# Altium PCB Nguon cam bien.PcbDoc
Units mil, origin at the board's own origin, x right, y up, seen from the top; angles counter-clockwise.
Board outline 4527.56 x 3799.21 mil, 2 copper layers (Top Layer, Bottom Layer); 37 components, 23 nets, 138 pads, 0 vias.
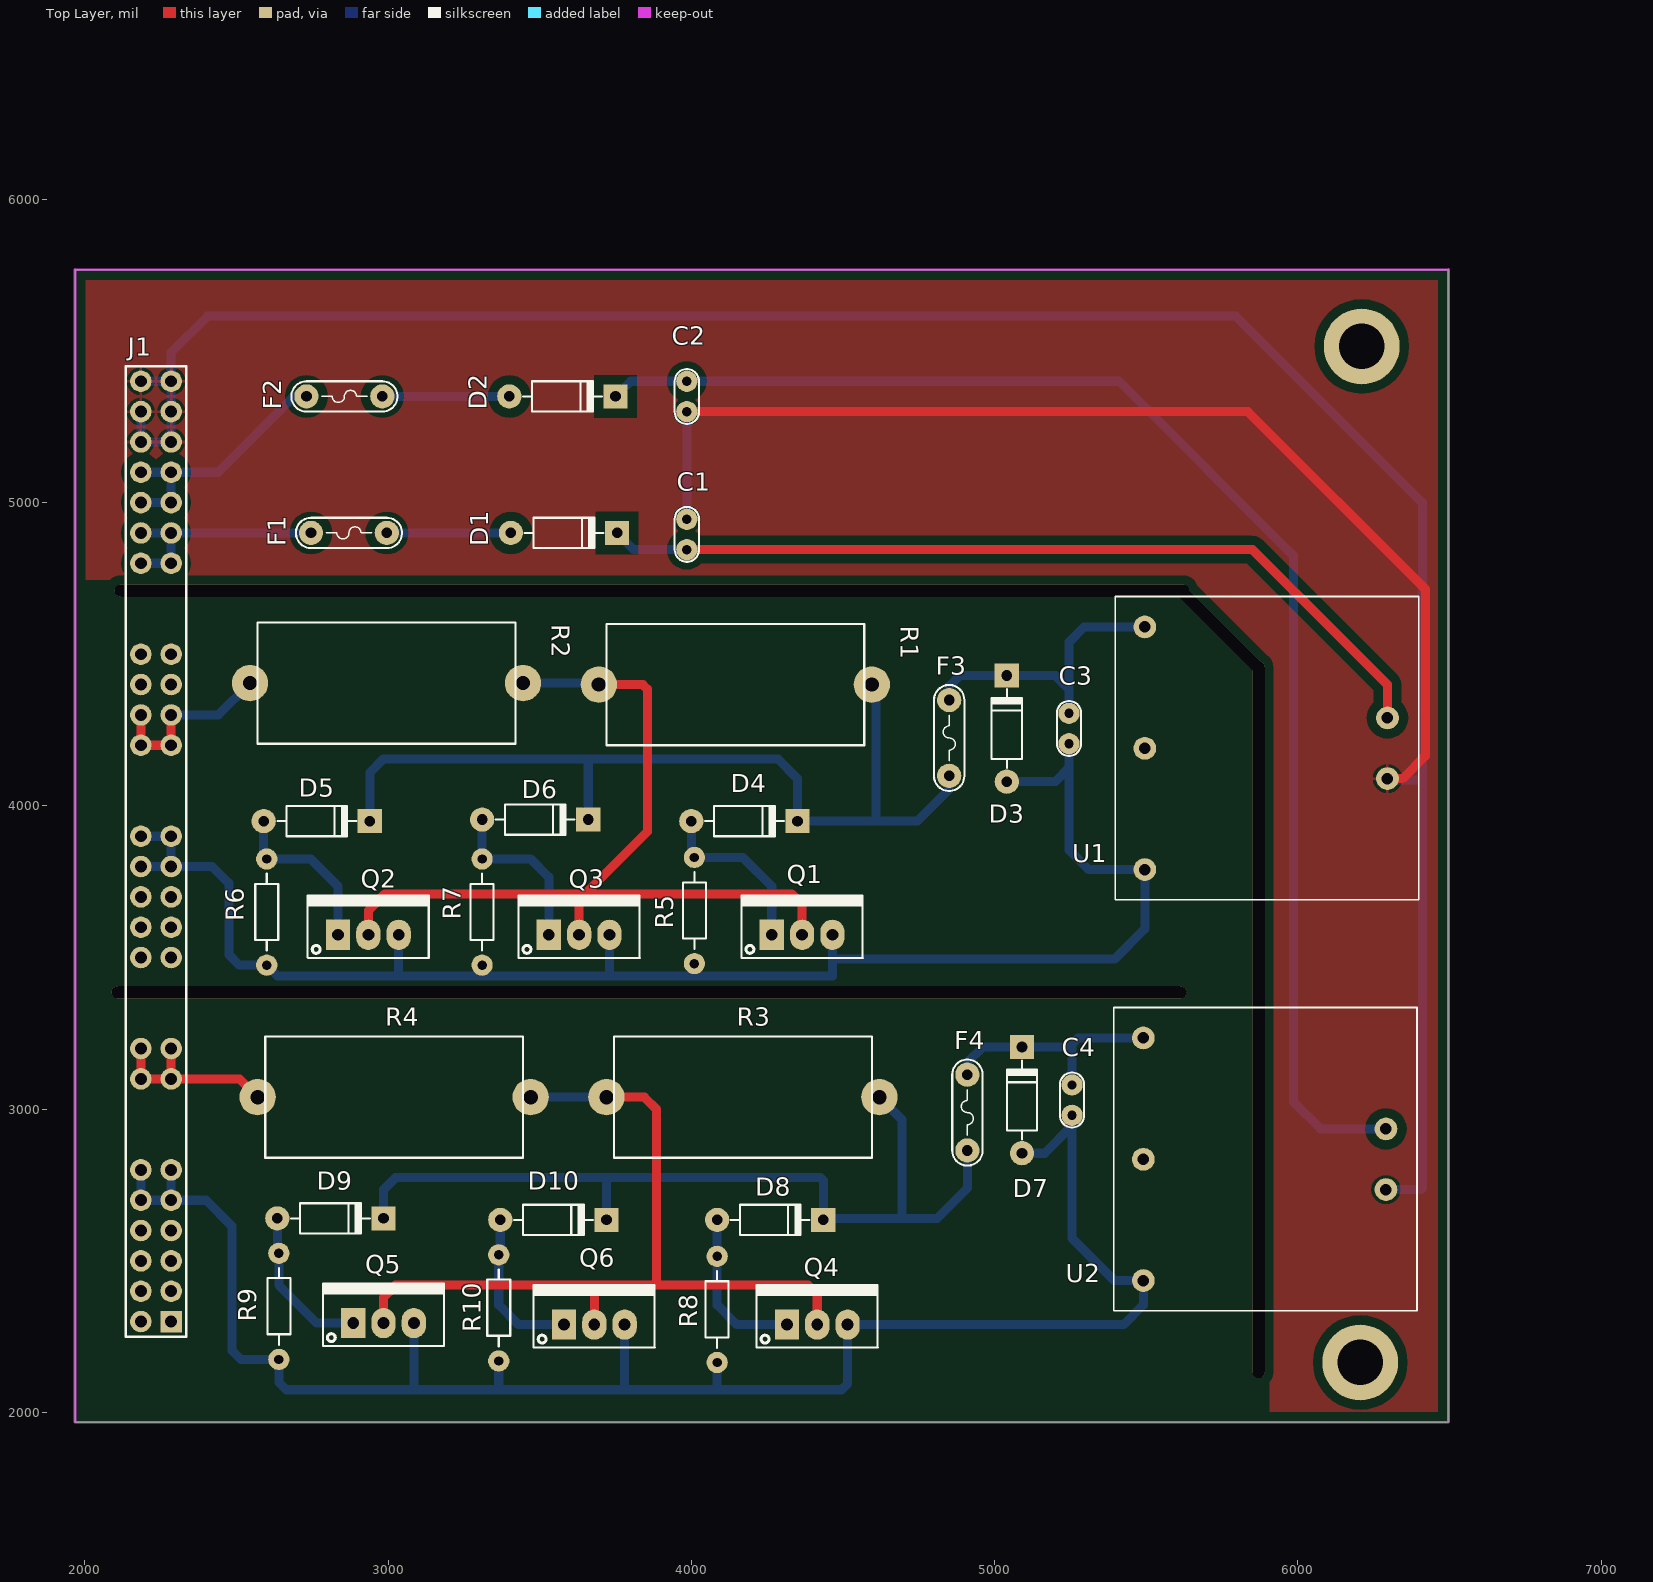
[diagram p0: Top Layer view]
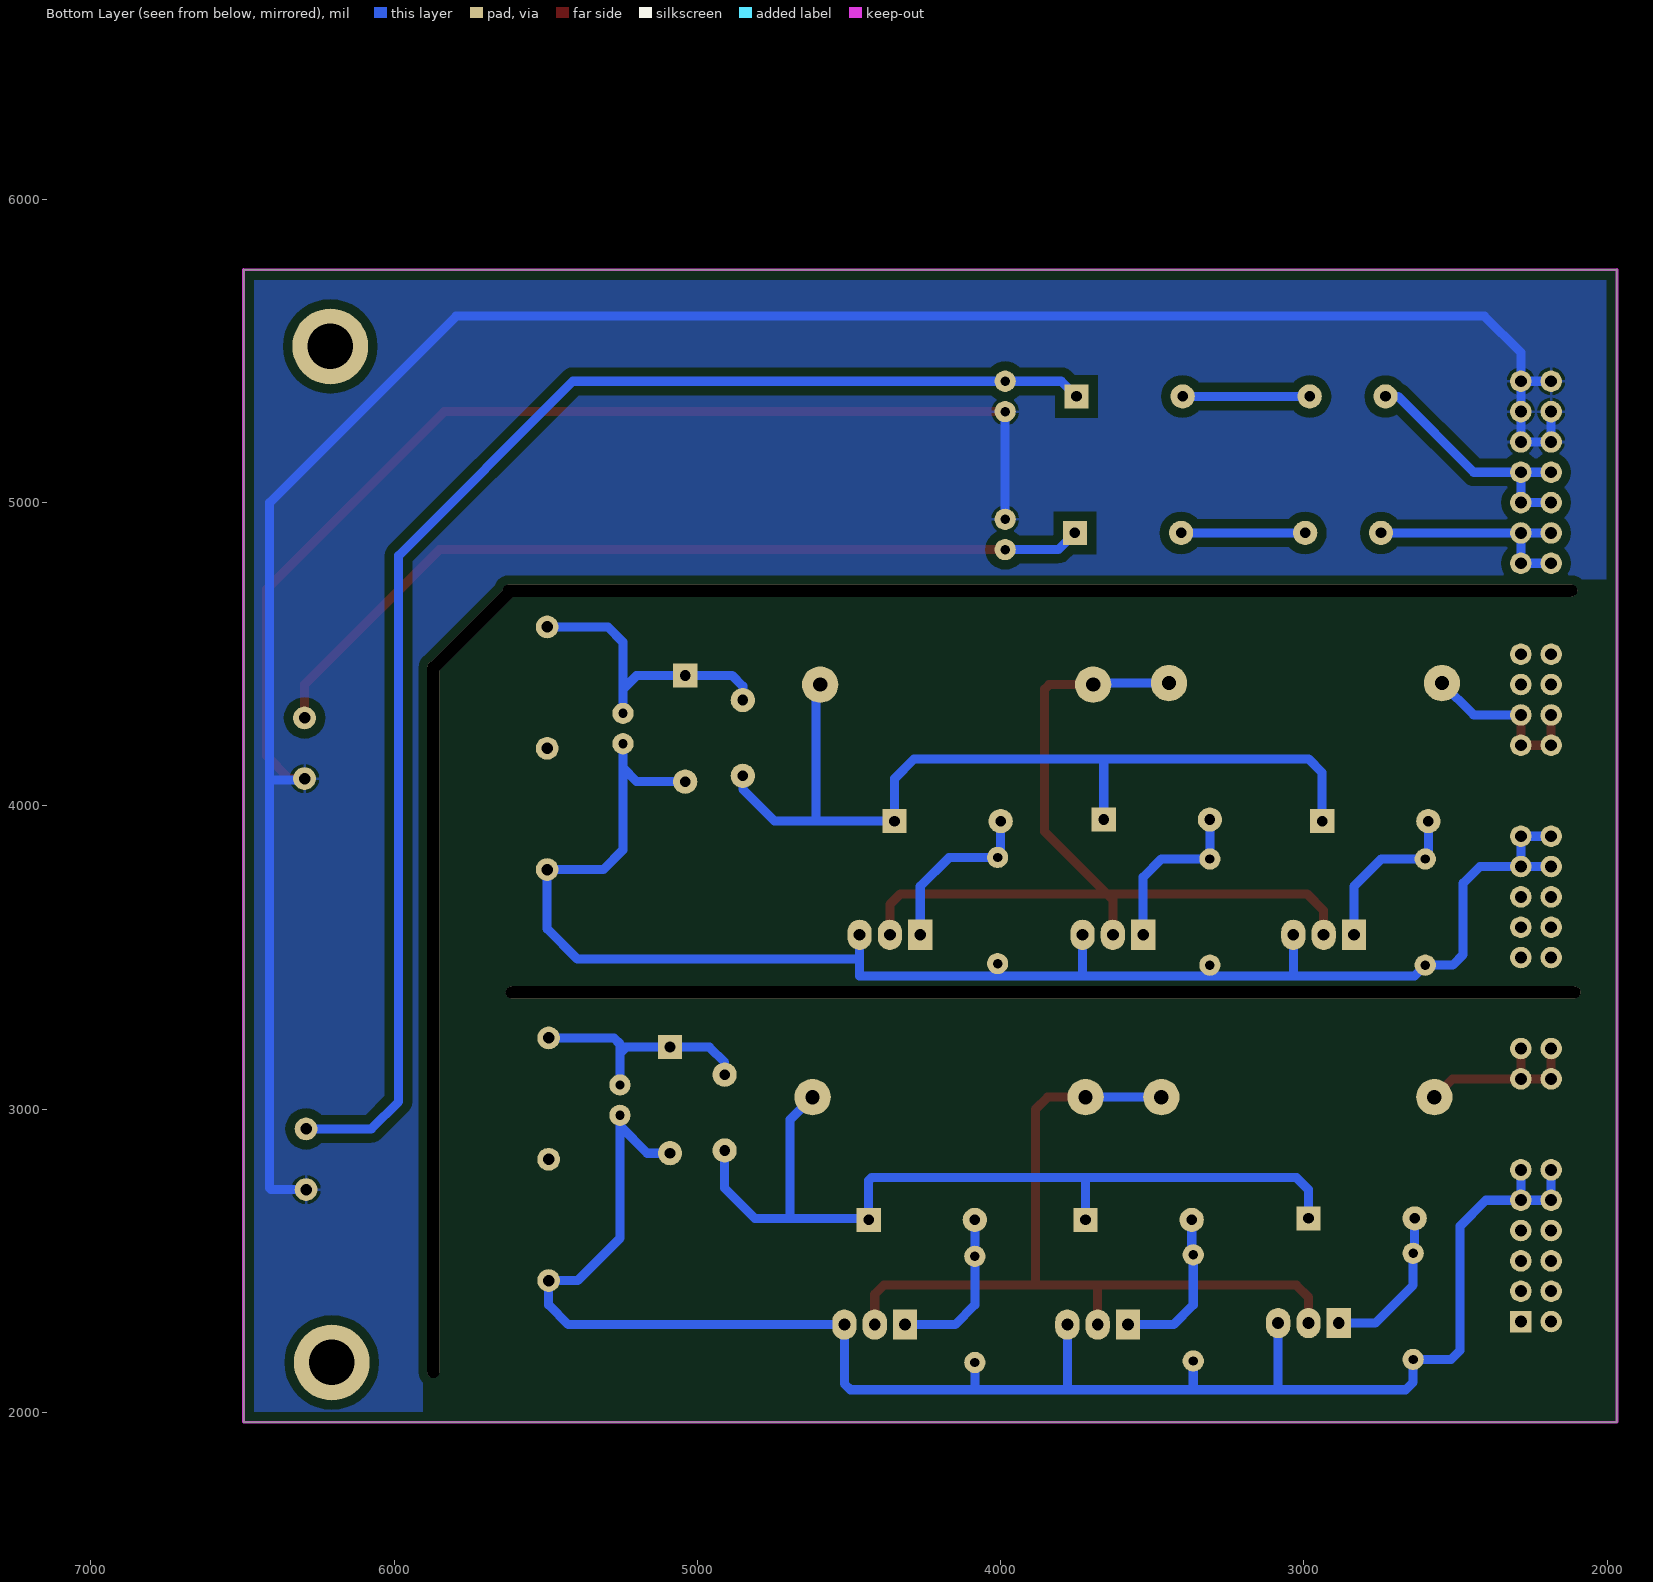
[diagram p1: Bottom Layer view, seen from below]
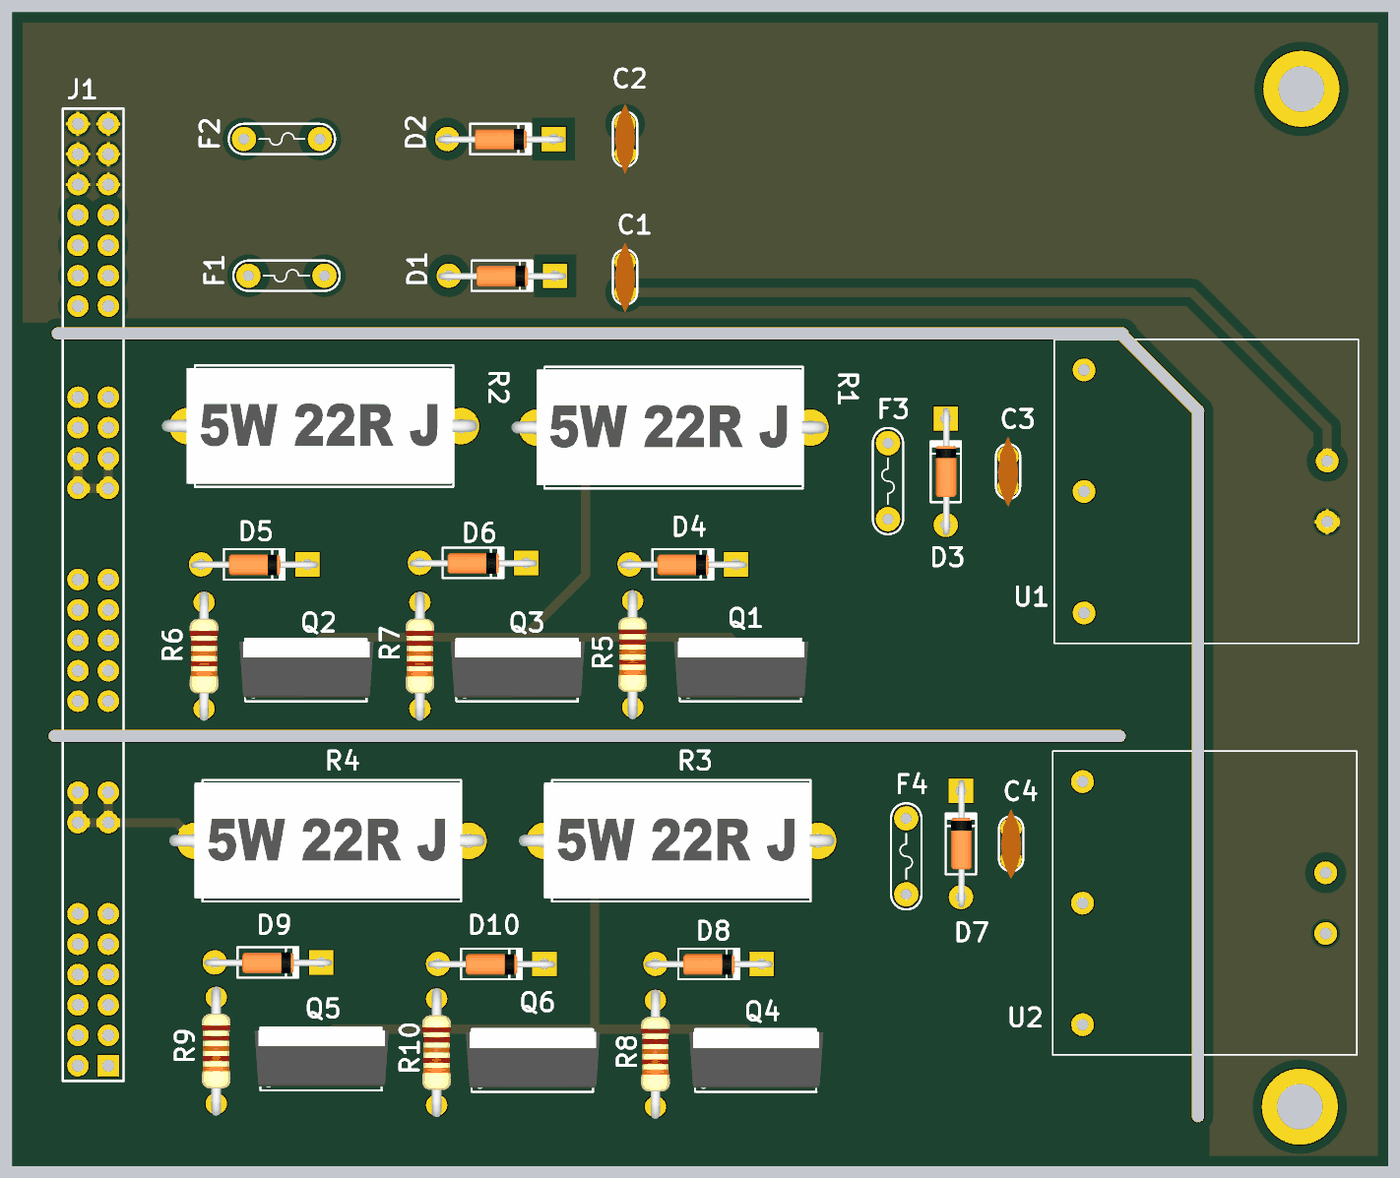
[diagram p2: 3D render of the assembled board from above, using the file's embedded part models]

## Layer stack, top to bottom
Top Solder: solder mask 0.4, Solder Resist, Dk 3.5
Top Layer: signal copper 1.4
Dielectric 1: dielectric 12.6, FR-4, Dk 4.8
Bottom Layer: signal copper 1.4
Bottom Solder: solder mask 0.4, Solder Resist, Dk 3.5

## Board outline
1968.5,1968.5 1968.5,5767.72 6496.06,5767.72 6496.06,1968.5

## Design rules (kind name [scope] priority, off if disabled: settings)
Clearance [All] p1: gap=30 ignorepadtopadclearanceinfootprint=FALSE
PolygonConnect [All] p1: connectstyle=Relief reliefconductorwidth=10 reliefentries=4 polygonreliefangle="90 Angle" airgapwidth=10
RoutingVias [All] p1: holewidth=28 width=50 viastyle="Through Hole" minholewidth=28 minwidth=50 maxholewidth=28 maxwidth=50
SolderMaskExpansion [All] p1: expansion=4
Width [All] p1: maxlimit=100 minlimit=10 preferedwidth=30
30 further rules are at their usual default settings.

## Components (designator, comment, footprint, x,y, rotation, side; value= is the part's Value field where it differs from the comment)
C1 "104" CN1 3985,4895 r90 top
C2 "104" CN1 3985,5350 r270 top
C3 "104" CN1 5245,4255 r90 top
C4 "104" CN1 5255,3030 r90 top
D1 "1N4007" D1A 3405,4900 r180 top
D2 "1N4007" D1A 3400,5350 r180 top
D3 "1.5KE12" D1A 5040,4080 r270 top
D4 "1.5KE12" D1A 4000,3950 r180 top
D5 "1.5KE12" D1A 2590,3950 r180 top
D6 "1.5KE12" D1A 3310,3955 r180 top
D7 "1.5KE12" D1A 5090,2855 r270 top
D8 "1.5KE12" D1A 4085,2635 r180 top
D9 "1.5KE12" D1A 2635,2640 r180 top
D10 "1.5KE12" D1A 3370,2635 r180 top
F1 "F1A" Fuse 2995,4900 r180 top
F2 "F1A" Fuse 2980,5350 r180 top
F3 "F0.5A" Fuse 4850,4100 r90 top
F4 "F0.5A" Fuse 4910,2865 r90 top
J1 "Header 32x2" Header32x2 2285,2300 r90 top
Q1 "2SK2936" QTO-220 4265,3575 r0 top
Q2 "2SK2936" QTO-220 2835,3575 r0 top
Q3 "2SK2936" QTO-220 3530,3575 r0 top
Q4 "2SK2936" QTO-220 4315,2290 r0 top
Q5 "2SK2936" QTO-220 2885,2295 r0 top
Q6 "2SK2936" QTO-220 3580,2290 r0 top
R1 "6.8" R5W 3695,4400 r0 top
R2 "6.8" R5W 2545,4405 r0 top
R3 "6.8" R5W 3720,3040 r0 top
R4 "6.8" R5W 2570,3040 r0 top
R5 "560" R1/4W 4010,3480 r90 top
R6 "560" R1/4W 2600,3475 r90 top
R7 "560" R1/4W 3310,3475 r90 top
R8 "560" R1/4W 4085,2165 r90 top
R9 "560" R1/4W 2640,2175 r90 top
R10 "560" R1/4W 3365,2170 r90 top
U1 "WRx-YMD-6W" WRB-YMD-6W 6295,4090 r90 top
U2 "WRx-YMD-6W" WRB-YMD-6W 6290,2735 r90 top

## Footprints (in the part's own frame and the unit in brackets; to place one, negate y for a bottom-side part, rotate by r counter-clockwise, add the part's x,y. Pads: shape width x height; smd on the part's side, far side on the other; paste and mask are expansions set on the pad)
CN1 [mil]
  round 70 hole 31: 1(-50,0) 2(50,0)
  silkscreen extent -90,-40 91,40, body extent -115,-33 115,33, height 265
D1A [mil] "Diode 1A, W 100mil, L 350mil"
  round 80 hole 35: 1(0,0)
  rect 80x80 hole 35: 2(-350,0)
  silkscreen extent -305,-50 -45,50, body extent -386,-33 34,36, height 84
Fuse [mil]
  round 80 hole 35: 1(-1,0) 2(249,0)
  silkscreen extent -51,-50 299,50
Header32x2 [mm] "Header32x2 - 16"
  rect 1.8x1.8 hole 1: 1(0,0)
  round 1.8 hole 1: 2(2.54,0) 3(5.08,0) 4(7.62,0) 5(10.16,0) 6(12.7,0) 9(20.32,0) 10(22.86,0) 13(30.48,0) 14(33.02,0) 15(35.56,0) 16(38.1,0) 17(40.64,0) 20(48.26,0) 21(50.8,0) 22(53.34,0) 23(55.88,0) 26(63.5,0) 27(66.04,0) 28(68.58,0) 29(71.12,0) 30(73.66,0) 31(76.2,0) 32(78.74,0) 33(0,2.54) 34(2.54,2.54) 35(5.08,2.54) 36(7.62,2.54) 37(10.16,2.54) 38(12.7,2.54) 41(20.32,2.54) 42(22.86,2.54) 45(30.48,2.54) 46(33.02,2.54) 47(35.56,2.54) 48(38.1,2.54) 49(40.64,2.54) 52(48.26,2.54) 53(50.8,2.54) 54(53.34,2.54) 55(55.88,2.54) 58(63.5,2.54) 59(66.04,2.54) 60(68.58,2.54) 61(71.12,2.54) 62(73.66,2.54) 63(76.2,2.54) 64(78.74,2.54)
  silkscreen extent -1.27,-1.27 80.01,3.81
QTO-220 [mil] "TO-220 - 1-2-3"
  rect 80x100 hole 39: 1(0,0)
  oval 80x100 hole 39: 2(100,0) 3(200,0)
  silkscreen extent -100,-76 300,130, body extent -119,-64 322,121, height 755
R1/4W [mil] "R 1/4W, 2 Pin, 350mil"
  round 70 hole 31: 1(0,0) 2(350,0)
  silkscreen extent 48,-38 302,38, body extent -40,-47 386,47, height 111
R5W [mil] "R5W , 2 pin, 400 x 950mil"
  round 120 hole 47.24: 1(0,0) 2(900,0)
  silkscreen extent 25,-200 875,200, body extent -85,-190 955,192, height 363
WRB-YMD-6W [mil] "Single output"
  round 75 hole 38: 1(0,0) 2(200,0) 3(500,800) 4(100,800) 5(-300,800)
  Top Layer lines w5: 0,0 -0.98,-0.98
  silkscreen extent -400,-102 600,898, body extent -399,-103 601,899, height 400

## Part data
C1 C2 C3 C4: library part CAP, "Cremic For Xtal 1pF => 100pF"
D1 D2: library part D1A, "Diode 1A"
D3 D4 D5 D6 D7 D8 D9 D10: library part Zener
F1 F2 F3 F4: library part Fuse, "Fuse"
Q1 Q2 Q3 Q4 Q5 Q6: library part IRF840, "MOSFET N - CHANNEL 500V - 0.75 - 8A - TO-220"
R1 R2 R3 R4 R5 R6 R7 R8 R9 R10: library part R1/4W, "Resistor 1/4W"
U1 U2: library part WRB-YMD-6W

## Free pads (board coordinates)
  oval 3543.31x39.37 hole 39.37 slot 3543.31 at 0 deg: 2(3860,3385) 2(3870,4710)
  oval 393.7x39.37 hole 39.37 slot 393.7 at 135 deg rot 135: 2(5745,4580)
  oval 39.37x2362.2 hole 39.37 slot 2362.2 at 90 deg: 2(5870,3295)
  round 250 hole 150: 4(6205,2165) 4(6210,5515)

## Nets (pads, with @x,y where several pads share a name; then routed paths per layer and width w, separated by ;. In a path a pad name is that pad's centre, name@x,y a point inside that pad or via, vN(x,y) a via of type N, cw(c..) or ccw(c..) an arc to the next point about the centre after c; other vN are vias at no path point)
GND: C1.2 C2.2 J1.30 J1.31 J1.32 J1.62 J1.63 J1.64 U1.1 U2.1 | length 11259
  Top Layer w30: C2.2 5835,5300 6420,4715 6420,4165 6345,4090 U1.1
  Bottom Layer w30: J1.63 J1.62 J1.30 J1.31 J1.32 ; J1.64 J1.32 ; C1.2@3975,4945 3985,4955 C2.2 ; U2.1 6405,2735 6410,2740 6410,4085 ; U1.1@6300,4085 6410,4085 ; J1.32 2285,5495 2405,5615 5795,5615 6410,5000 6410,4085
N01: C3.1 D3.1 J1.16 J1.17 J1.48 J1.49 Q1.3 Q2.3 Q3.3 R5.1 R6.1 R7.1 U1.5 | length 5340.3
  Bottom Layer w30: J1.48 J1.16 ; J1.49 J1.17 J1.16 ; 3035,3444.68 Q2.3 ; R7.1 3310,3439.68 ; 3730,3454.68 Q3.3 ; 4010,3444.68 R5.1 ; Q1.3 4465,3495 ; D3.1 5200,4080 5245,4125 ; C3.1 5245,4125 ; J1.16 2420,3800 2475,3745 2475,3510 2510,3475 R6.1 2635.32,3439.68 3310,3439.68 ; 3310,3439.68 4464.69,3439.68 4465,3440 4465,3495 ; 4465,3495 5395,3495 5495,3595 U1.5 5310,3790 5245,3855 5245,4125
N02: C4.1 D7.1 J1.5 J1.6 J1.37 J1.38 Q4.3 Q5.3 Q6.3 R8.1 R9.1 R10.1 U2.5 | length 5878.5
  Bottom Layer w30: J1.38 J1.37 J1.5 ; J1.6 J1.5 ; Q5.3 3085,2075 ; R10.1 3365,2075 ; Q6.3 3780,2075 ; R8.1 4085,2075 ; D7.1 5165,2855 5255,2945 ; C4.1 5255,2945 ; J1.5 2400,2700 2485,2615 2485,2205 2515,2175 R9.1 2640,2100 2665,2075 3085,2075 ; 3085,2075 3365,2075 ; 3365,2075 3780,2075 ; 3780,2075 4085,2075 ; 4085,2075 4495,2075 4515,2095 Q4.3 5425,2290 5490,2355 U2.5 5395,2435 5255,2575 5255,2945
NetC1_1: C1.1 D1.2 U1.2 | length 2857.1
  Top Layer w30: C1.1 5850,4845 6295,4400 U1.2
  Bottom Layer w30: D1.2 3810,4845 C1.1
NetC2_1: C2.1 D2.2 U2.2 | length 4636.2
  Bottom Layer w30: D2.2 3800,5400 C2.1 5410,5400 5985,4825 5985,3025 6075,2935 U2.2
NetC3_2: C3.2 D3.2 F3.2 U1.3 | length 1059.8
  Bottom Layer w30: F3.2 4850,4395 4885,4430 D3.2 5200,4430 5245,4385 C3.2 5245,4540 5295,4590 U1.3
NetC4_2: C4.2 D7.2 F4.2 U2.3 | length 898.3
  Bottom Layer w30: F4.2 4910,3155 4960,3205 D7.2 5235,3205 5255,3185 C4.2 5255,3215 5275,3235 U2.3
NetD1_1: D1.1 F1.1 | length 409
  Bottom Layer w30: F1.1 D1.1
NetD2_1: D2.1 F2.1 | length 419
  Bottom Layer w30: F2.1 D2.1
NetD4_1: D4.1 Q1.1 R5.2 | length 564.4
  Bottom Layer w30: R5.2@4000,3840 D4.1 ; R5.2 4170,3830 4265,3735 Q1.1
NetD4_2: D4.2 D5.2 D6.2 F3.1 R1.2 | length 2998.9
  Bottom Layer w30: D5.2 2940,4110 2985,4155 3660,4155 ; D6.2 3660,4155 ; R1.2 4609,4386 4609,3950 ; F3.1 4850,4055 4745,3950 4609,3950 ; 3660,4155 4285,4155 4350,4090 D4.2 4609,3950
NetD5_1: D5.1 Q2.1 R6.2 | length 561.4
  Bottom Layer w30: D5.1 2590,3835 R6.2 2745,3825 2835,3735 Q2.1
NetD6_1: D6.1 Q3.1 R7.2 | length 564.9
  Bottom Layer w30: D6.1 R7.2 3470,3825 3530,3765 Q3.1
NetD8_1: D8.1 Q4.1 R8.2 | length 536.9
  Bottom Layer w30: D8.1 R8.2 4085,2355 4150,2290 Q4.1
NetD8_2: D8.2 D9.2 D10.2 F4.1 R3.2 | length 2901.8
  Bottom Layer w30: D9.2 2985,2735 3025,2775 3720,2775 ; D10.2 3720,2775 ; D8.2 4435,2765 4425,2775 3720,2775 ; D8.2@4440,2640 4694,2640 ; R3.2 4694,2966 4694,2640 ; F4.1 4910,2740 4810,2640 4694,2640
NetD9_1: D9.1 Q5.1 R9.2 | length 511.8
  Bottom Layer w30: R9.2@2635,2530 D9.1 ; R9.2 2640,2420 2765,2295 Q5.1
NetD10_1: D10.1 Q6.1 R10.2 | length 516.9
  Bottom Layer w30: R10.2 3365,2355 3430,2290 Q6.1 ; R10.2@3370,2525 D10.1
NetQ1_2: Q1.2 Q2.2 Q3.2 R1.1 R2.2 | length 2961.7
  Top Layer w30: Q2.2 2935,3655 2990,3710 3650,3710 ; Q3.2 3630,3690 3650,3710 ; R1.1 3840,4400 3855,4385 3855,3915 3650,3710 ; Q1.2 4365,3675 4330,3710 3650,3710
  Bottom Layer w30: R2.2 R1.1@3690,4405
NetQ4_2: Q4.2 Q5.2 Q6.2 R3.1 R4.2 | length 2775.6
  Top Layer w30: Q5.2 2985,2380 3025,2420 3885,2420 ; Q6.2 3680,2410 ; R3.1 3845,3040 3885,3000 3885,2420 ; Q4.2 4415,2390 4385,2420 3885,2420
  Bottom Layer w30: R4.2 R3.1
P01: J1.20 J1.21 J1.52 J1.53 R2.1 | length 603.5
  Top Layer w30: J1.53 J1.52 J1.20 J1.21
  Bottom Layer w30: J1.21 2440,4300 R2.1
P02: J1.9 J1.10 J1.41 J1.42 R4.1 | length 609.9
  Top Layer w30: J1.42 J1.41 J1.9 ; J1.10 J1.9 ; R4.1 2510,3100 J1.9
PS01: F1.2 J1.26 J1.27 J1.58 J1.59 | length 761
  Bottom Layer w30: J1.58 J1.26 J1.27 ; J1.59 J1.27 ; F1.2 J1.27
PS02: F2.2 J1.28 J1.29 J1.60 J1.61 | length 849.6
  Bottom Layer w30: J1.60 J1.28 J1.29 ; J1.61 J1.29 ; F2.2 2690,5350 2440,5100 J1.29
pads on no net: J1.1 J1.2 J1.3 J1.4 J1.13 J1.14 J1.15 J1.22 J1.23 J1.33 J1.34 J1.35 J1.36 J1.45 J1.46 J1.47 J1.54 J1.55 U1.4 U2.4

## Polygon pours and split planes (outlines as drawn)
GND on Bottom Layer "GND_L02_P000" (solid, remove dead copper, pour order 0): 1968.5,5764.74 6496.06,5764.74 6496.06,1971.59 6490,1965.53 5905,1965.53 5905,4467.03 5625,4747.03 1970,4747.03
GND on Top Layer "GND_L01_P002" (solid, remove dead copper, pour order 2): 1971.2,5763.31 6498.76,5763.31 6498.76,1970.16 6492.69,1964.1 5907.69,1964.1 5907.69,4465.59 5627.69,4745.59 1972.69,4745.59

## Keep-outs
Keep-Out Layer:
  the board outline again, w8